# Altium PCB PCB1.PcbDoc
Units mil, origin at the board's own origin, x right, y up, seen from the top; angles counter-clockwise.
Board outline 3010.03 x 3160.03 mil, 2 copper layers (Top Layer, Bottom Layer); 6 components, 93 nets, 200 pads, 0 vias.
Unrouted connection lines stored in the file: 5.
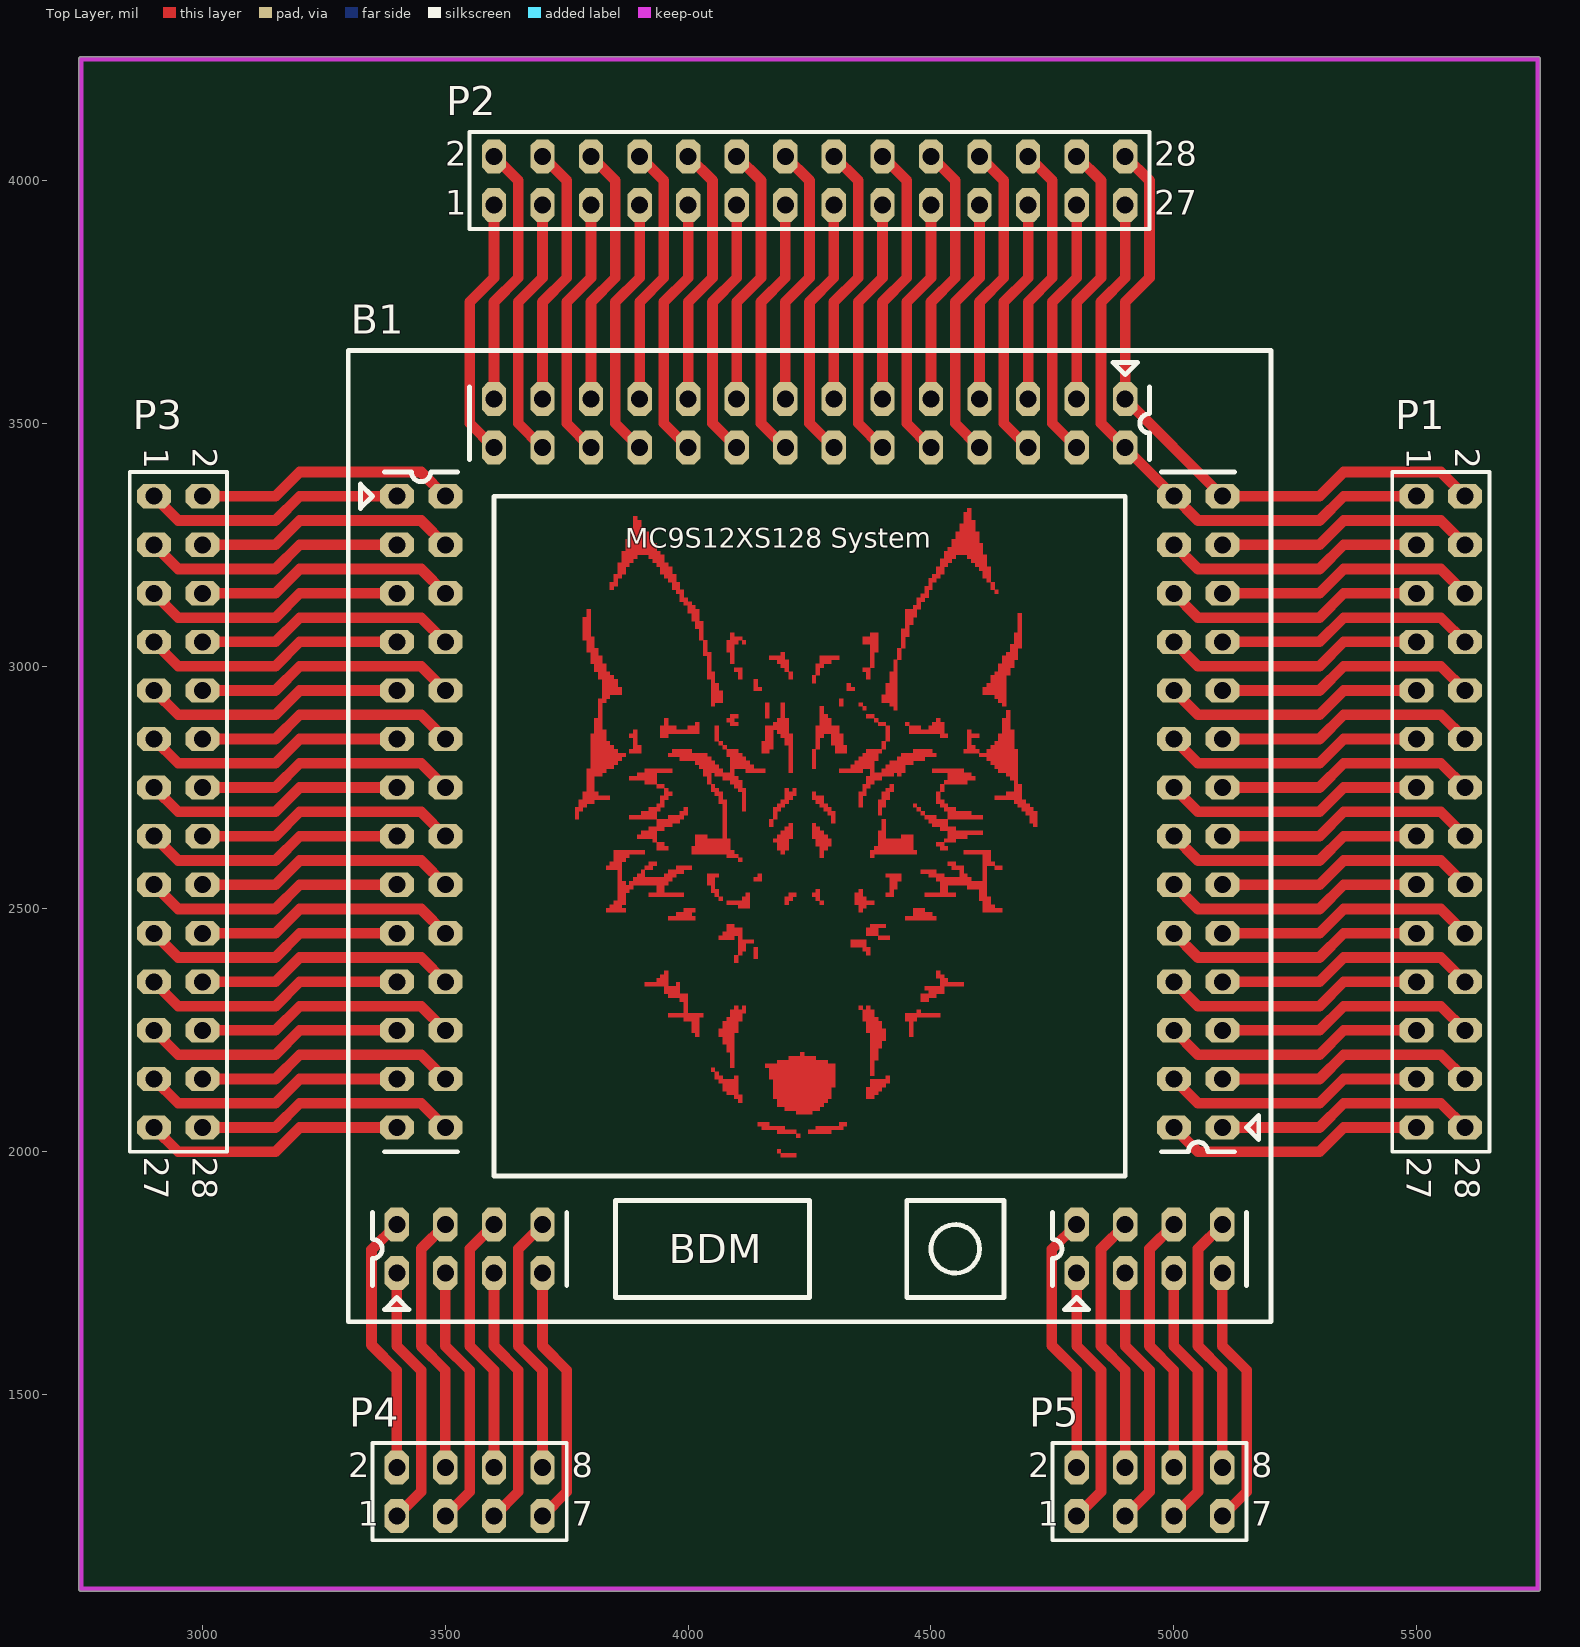
[diagram p0: Top Layer view]
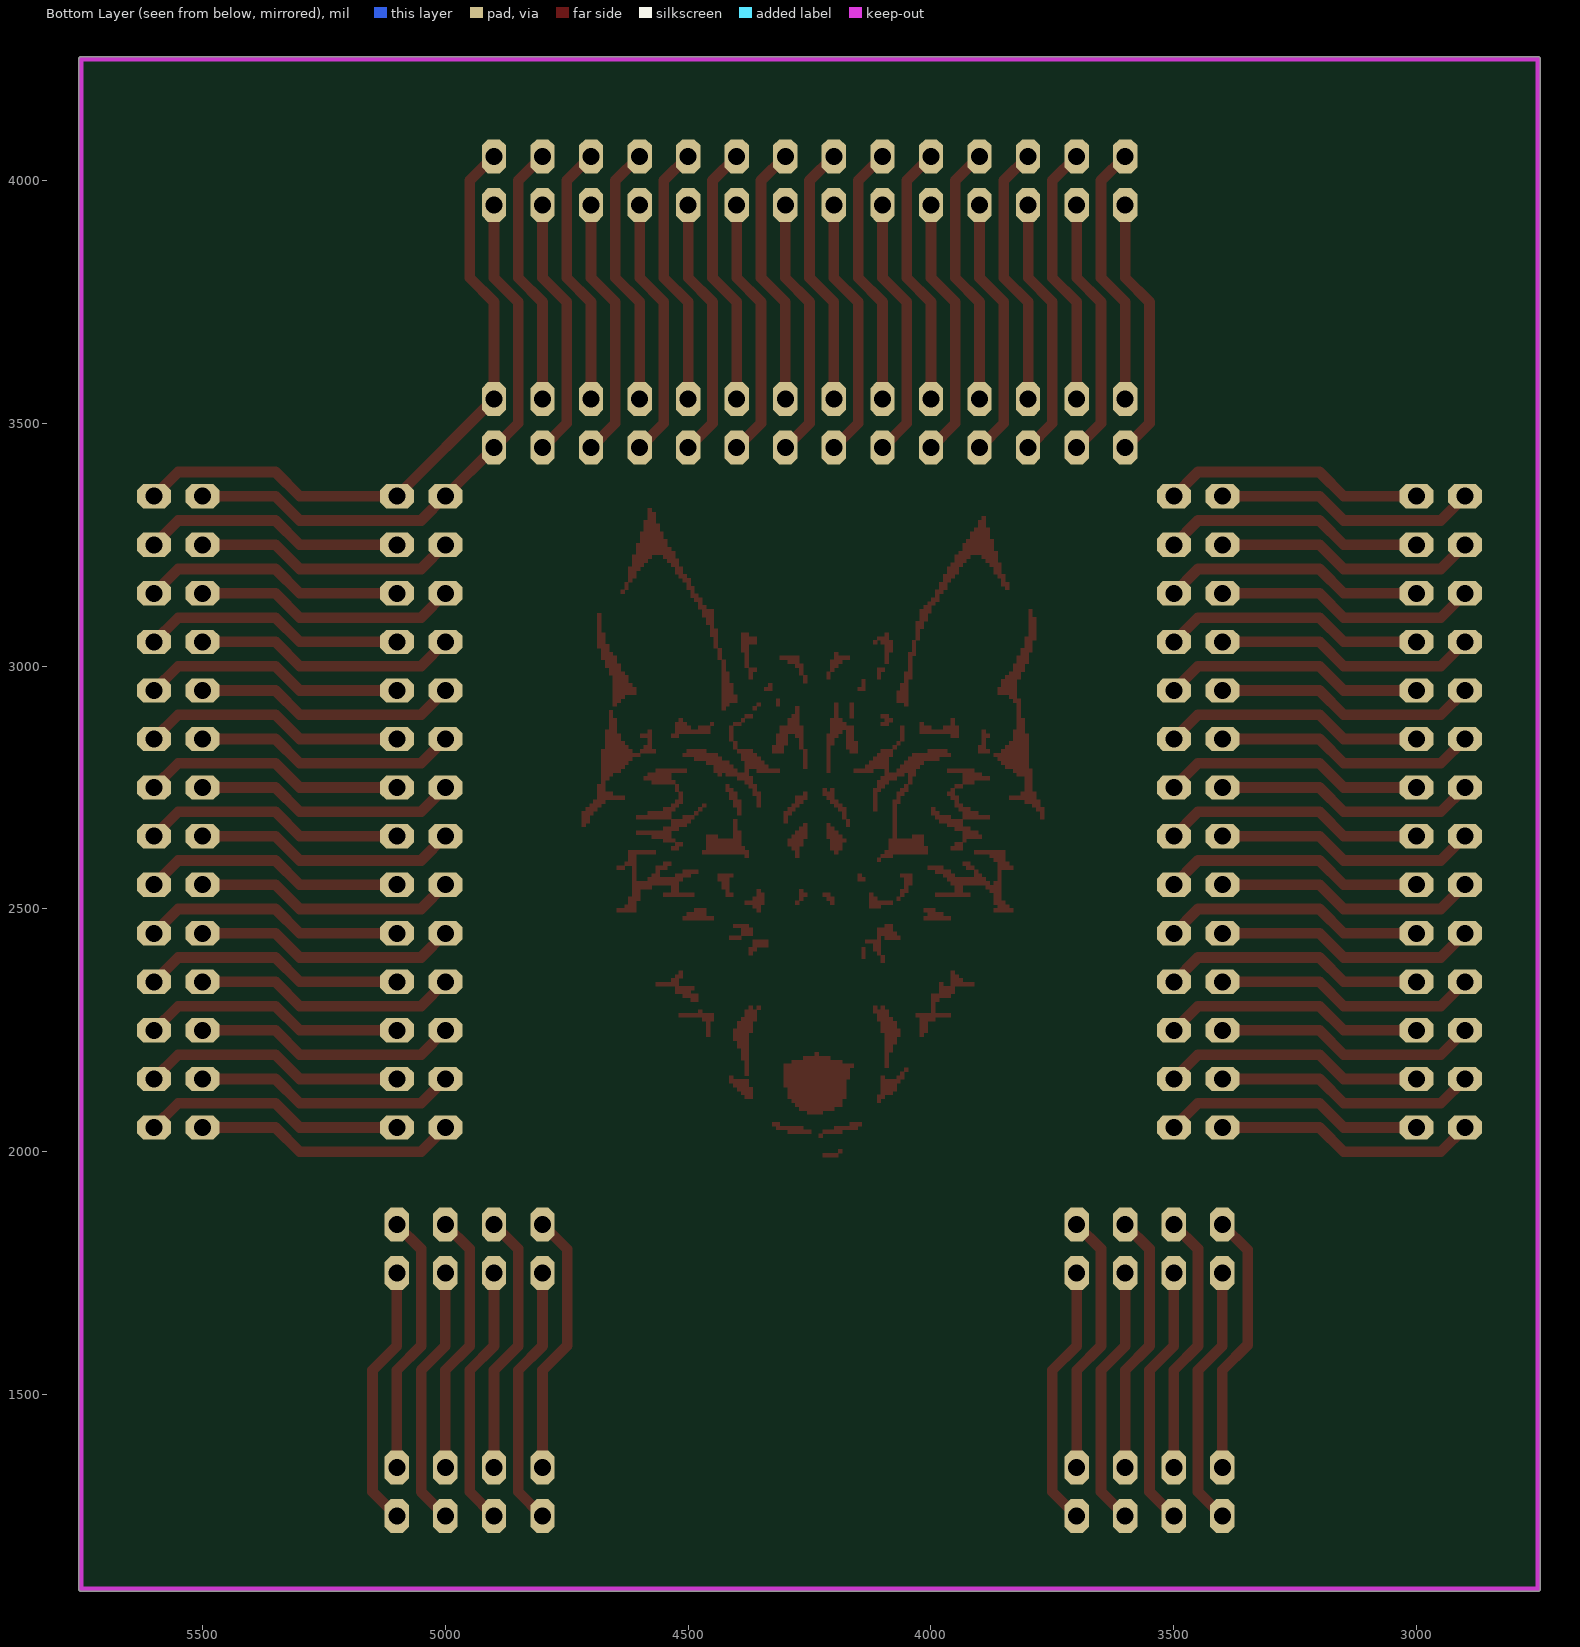
[diagram p1: Bottom Layer view, seen from below]

## Layer stack, top to bottom
Top Solder: solder mask 0.4, Solder Resist, Dk 3.5
Top Layer: signal copper 1.4
Dielectric 1: dielectric 12.6, FR-4, Dk 4.8
Bottom Layer: signal copper 1.4
Bottom Solder: solder mask 0.4, Solder Resist, Dk 3.5

## Board outline
2744.99,1100 ccw(c2750,1100) 2750,1094.98 5750,1094.98 ccw(c5750,1100) 5755.02,1100 5755.02,4250 ccw(c5750,4250) 5750,4255.02 2750,4255.02 ccw(c2750,4250) 2744.99,4250

## Design rules (kind name [scope] priority, off if disabled: settings)
Clearance [All] p1: gap=10
PolygonConnect [All] p1: connectstyle=Relief reliefconductorwidth=10 reliefentries=4 polygonreliefangle="90 Angle" airgapwidth=10
RoutingVias [All] p1: holewidth=28 width=50 viastyle="Through Hole" minholewidth=28 minwidth=50 maxholewidth=50 maxwidth=100
SolderMaskExpansion [All] p1: expansion=4
Width [All] p1: maxlimit=100 minlimit=10 preferedwidth=20
30 further rules are at their usual default settings.

## Components (designator, comment, footprint, x,y, rotation, side; value= is the part's Value field where it differs from the comment)
B1 "XS128P112_Board_2" XS128P112_BOARD 4250,2650 r0 top
P1 "Header 14X2" HDR2X14 5500,3350 r270 top
P2 "Header 14X2" HDR2X14 3600,3950 r0 top
P3 "Header 14X2" HDR2X14 2900,3350 r270 top
P4 "Header 4X2" HDR2X4 3400,1250 r0 top
P5 "Header 4X2" HDR2X4 4800,1250 r0 top

## Footprints (in the part's own frame and the unit in brackets; to place one, negate y for a bottom-side part, rotate by r counter-clockwise, add the part's x,y. Pads: shape width x height; smd on the part's side, far side on the other; paste and mask are expansions set on the pad)
HDR2X4 [mil] "Connector; Header; 4x2 Position"
  oct 50x70 hole 35: 1(0,0) 2(0,100) 3(100,0) 4(100,100) 5(200,0) 6(200,100) 7(300,0) 8(300,100)
  silkscreen extent -50,-50 350,150
HDR2X14 [mil] "Connector; Header; 14x2 Position"
  oct 50x70 hole 35: 1(0,0) 2(0,100) 3(100,0) 4(100,100) 5(200,0) 6(200,100) 7(300,0) 8(300,100) 9(400,0) 10(400,100) 11(500,0) 12(500,100) 13(600,0) 14(600,100) 15(700,0) 16(700,100) 17(800,0) 18(800,100) 19(900,0) 20(900,100) 21(1000,0) 22(1000,100) 23(1100,0) 24(1100,100) 25(1200,0) 26(1200,100) 27(1300,0) 28(1300,100)
  silkscreen extent -50,-50 1350,150
XS128P112_BOARD [mil]
  oct 70x50 hole 35: 101(-850,700) 102(-750,700) 103(-850,600) 104(-750,600) 105(-850,500) 106(-750,500) 107(-850,400) 108(-750,400) 109(-850,300) 110(-750,300) 111(-850,200) 112(-750,200) 113(-850,100) 114(-750,100) 115(-850,0) 116(-750,0) 117(-850,-100) 118(-750,-100) 119(-850,-200) 120(-750,-200) 121(-850,-300) 122(-750,-300) 123(-850,-400) 124(-750,-400) 125(-850,-500) 126(-750,-500) 127(-850,-600) 128(-750,-600) 301(850,-600) 302(750,-600) 303(850,-500) 304(750,-500) 305(850,-400) 306(750,-400) 307(850,-300) 308(750,-300) 309(850,-200) 310(750,-200) 311(850,-100) 312(750,-100) 313(850,0) 314(750,0) 315(850,100) 316(750,100) 317(850,200) 318(750,200) 319(850,300) 320(750,300) 321(850,400) 322(750,400) 323(850,500) 324(750,500) 325(850,600) 326(750,600) 327(850,700) 328(750,700)
  oct 50x70 hole 35: 201(650,900) 202(650,800) 203(550,900) 204(550,800) 205(450,900) 206(450,800) 207(350,900) 208(350,800) 209(250,900) 211(150,900) 212(150,800) 213(50,900) 214(50,800) 215(-50,900) 216(-50,800) 217(-150,900) 218(-150,800) 219(-250,900) 220(-250,800) 221(-350,900) 222(-350,800) 223(-450,900) 224(-450,800) 225(-550,900) 226(-550,800) 227(-650,900) 228(-650,800) 401(-850,-900) 402(-850,-800) 403(-750,-900) 404(-750,-800) 405(-650,-900) 406(-650,-800) 407(-550,-900) 408(-550,-800) 501(550,-900) 502(550,-800) 503(650,-900) 504(650,-800) 505(750,-900) 506(750,-800) 507(850,-900) 508(850,-800)
  oct 50x70 hole 35 paste+0: 210(250,800)
  silkscreen extent -950,-1000 950,1000

## Part data
P1 P2 P3: "Header, 14-Pin, Dual row"
P4 P5: "Header, 4-Pin, Dual row"

## Nets (pads, with @x,y where several pads share a name; then routed paths per layer and width w, separated by ;. In a path a pad name is that pad's centre, name@x,y a point inside that pad or via, vN(x,y) a via of type N, cw(c..) or ccw(c..) an arc to the next point about the centre after c; other vN are vias at no path point)
5V: B1.201 B1.203 B1.325 B1.327 P1.2 P1.4 P2.26 P2.28 | length 2448.5
  Top Layer w22: B1.203 4800,3750 4850,3800 4850,4000 P2.26 ; P2.28 4950,4000 4950,3800 4900,3750 B1.201 B1.327 5300,3350 5350,3400 5550,3400 P1.2 ; B1.325 5300,3250 5350,3300 5550,3300 P1.4
A0: B1.301 P1.28 | length 541.4
  Top Layer w22: B1.301 5300,2050 5350,2100 5550,2100 P1.28
A1: B1.302 P1.27 | length 541.4
  Top Layer w22: B1.302 5050,2000 5300,2000 5350,2050 P1.27
A2: B1.303 P1.26 | length 541.4
  Top Layer w22: B1.303 5300,2150 5350,2200 5550,2200 P1.26
A3: B1.304 P1.25 | length 541.4
  Top Layer w22: B1.304 5050,2100 5300,2100 5350,2150 P1.25
A4: B1.305 P1.24 | length 541.4
  Top Layer w22: B1.305 5300,2250 5350,2300 5550,2300 P1.24
A5: B1.306 P1.23 | length 541.4
  Top Layer w22: B1.306 5050,2200 5300,2200 5350,2250 P1.23
A6: B1.307 P1.22 | length 541.4
  Top Layer w22: B1.307 5300,2350 5350,2400 5550,2400 P1.22
A7: B1.308 P1.21 | length 541.4
  Top Layer w22: B1.308 5050,2300 5300,2300 5350,2350 P1.21
AD0: B1.309 P1.20 | length 541.4
  Top Layer w22: B1.309 5300,2450 5350,2500 5550,2500 P1.20
AD1: B1.311 P1.18 | length 541.4
  Top Layer w22: B1.311 5300,2550 5350,2600 5550,2600 P1.18
AD2: B1.313 P1.16 | length 541.4
  Top Layer w22: B1.313 5300,2650 5350,2700 5550,2700 P1.16
AD3: B1.315 P1.14 | length 541.4
  Top Layer w22: B1.315 5300,2750 5350,2800 5550,2800 P1.14
AD4: B1.317 P1.12 | length 541.4
  Top Layer w22: B1.317 5300,2850 5350,2900 5550,2900 P1.12
AD5: B1.319 P1.10 | length 541.4
  Top Layer w22: B1.319 5300,2950 5350,3000 5550,3000 P1.10
AD6: B1.321 P1.8 | length 541.4
  Top Layer w22: B1.321 5300,3050 5350,3100 5550,3100 P1.8
AD7: B1.323 P1.6 | length 541.4
  Top Layer w22: B1.323 5300,3150 5350,3200 5550,3200 P1.6
AD8: B1.310 P1.19 | length 541.4
  Top Layer w22: B1.310 5050,2400 5300,2400 5350,2450 P1.19
AD9: B1.312 P1.17 | length 541.4
  Top Layer w22: B1.312 5050,2500 5300,2500 5350,2550 P1.17
AD10: B1.314 P1.15 | length 541.4
  Top Layer w22: B1.314 5050,2600 5300,2600 5350,2650 P1.15
AD11: B1.316 P1.13 | length 541.4
  Top Layer w22: B1.316 5050,2700 5300,2700 5350,2750 P1.13
AD12: B1.318 P1.11 | length 541.4
  Top Layer w22: B1.318 5050,2800 5300,2800 5350,2850 P1.11
AD13: B1.320 P1.9 | length 541.4
  Top Layer w22: B1.320 5050,2900 5300,2900 5350,2950 P1.9
AD14: B1.322 P1.7 | length 541.4
  Top Layer w22: B1.322 5050,3000 5300,3000 5350,3050 P1.7
AD15: B1.324 P1.5 | length 541.4
  Top Layer w22: B1.324 5050,3100 5300,3100 5350,3150 P1.5
B0: B1.121 P3.21 | length 541.4
  Top Layer w22: P3.21 2950,2300 3150,2300 3200,2350 B1.121
B1: B1.122 P3.22 | length 541.4
  Top Layer w22: P3.22 3150,2350 3200,2400 3450,2400 B1.122
B2: B1.123 P3.23 | length 541.4
  Top Layer w22: P3.23 2950,2200 3150,2200 3200,2250 B1.123
B3: B1.124 P3.24 | length 541.4
  Top Layer w22: P3.24 3150,2250 3200,2300 3450,2300 B1.124
B4: B1.125 P3.25 | length 541.4
  Top Layer w22: P3.25 2950,2100 3150,2100 3200,2150 B1.125
B5: B1.126 P3.26 | length 541.4
  Top Layer w22: P3.26 3150,2150 3200,2200 3450,2200 B1.126
B6: B1.127 P3.27 | length 541.4
  Top Layer w22: P3.27 2950,2000 3150,2000 3200,2050 B1.127
B7: B1.128 P3.28 | length 541.4
  Top Layer w22: P3.28 3150,2050 3200,2100 3450,2100 B1.128
E0: B1.508 P5.8 | length 541.4
  Top Layer w22: P5.8 5100,1550 5050,1600 5050,1800 B1.508
E1: B1.507 P5.7 | length 541.4
  Top Layer w22: P5.7 5150,1300 5150,1550 5100,1600 B1.507
E2: B1.506 P5.6 | length 541.4
  Top Layer w22: P5.6 5000,1550 4950,1600 4950,1800 B1.506
E3: B1.505 P5.5 | length 541.4
  Top Layer w22: P5.5 5050,1300 5050,1550 5000,1600 B1.505
E4: B1.407 P4.7 | length 541.4
  Top Layer w22: P4.7 3750,1300 3750,1550 3700,1600 B1.407
E5: B1.405 P4.5 | length 541.4
  Top Layer w22: P4.5 3650,1300 3650,1550 3600,1600 B1.405
E6: B1.408 P4.8 | length 541.4
  Top Layer w22: P4.8 3700,1550 3650,1600 3650,1800 B1.408
E7: B1.406 P4.6 | length 541.4
  Top Layer w22: P4.6 3600,1550 3550,1600 3550,1800 B1.406
GND: B1.202 B1.204 B1.223 B1.326 B1.328 P1.1 P1.3 P2.6 P2.25 P2.27 | length 2848.5
  Top Layer w22: B1.223 3800,3750 3850,3800 3850,4000 P2.6 ; B1.204 4750,3500 4750,3750 4800,3800 P2.25 ; P2.27 4900,3800 4850,3750 4850,3500 B1.202 B1.328 5050,3300 5300,3300 5350,3350 P1.1 ; B1.326 5050,3200 5300,3200 5350,3250 P1.3
H0: B1.504 P5.4 | length 541.4
  Top Layer w22: P5.4 4900,1550 4850,1600 4850,1800 B1.504
H1: B1.503 P5.3 | length 541.4
  Top Layer w22: P5.3 4950,1300 4950,1550 4900,1600 B1.503
H2: B1.502 P5.2 | length 542.2
  Top Layer w22: P5.2 4800,1550 4749,1601 4749,1799 B1.502
H3: B1.501 P5.1 | length 541.4
  Top Layer w22: P5.1 4850,1300 4850,1550 4800,1600 B1.501
H4: B1.403 P4.3 | length 541.4
  Top Layer w22: P4.3 3550,1300 3550,1550 3500,1600 B1.403
H5: B1.404 P4.4 | length 541.4
  Top Layer w22: P4.4 3500,1550 3450,1600 3450,1800 B1.404
H6: B1.401 P4.1 | length 541.4
  Top Layer w22: P4.1 3450,1300 3450,1550 3400,1600 B1.401
H7: B1.402 P4.2 | length 543.1
  Top Layer w22: P4.2 3400,1550 3348,1602 3348,1798 B1.402
J0: B1.120 P3.20 | length 541.4
  Top Layer w22: P3.20 3150,2450 3200,2500 3450,2500 B1.120
J1: B1.119 P3.19 | length 541.4
  Top Layer w22: P3.19 2950,2400 3150,2400 3200,2450 B1.119
J6: B1.215 P2.14 | length 541.4
  Top Layer w22: B1.215 4200,3750 4250,3800 4250,4000 P2.14
J7: B1.216 P2.13 | length 541.4
  Top Layer w22: B1.216 4150,3500 4150,3750 4200,3800 P2.13
K0: B1.108 P3.8 | length 541.4
  Top Layer w22: P3.8 3150,3050 3200,3100 3450,3100 B1.108
K1: B1.107 P3.7 | length 541.4
  Top Layer w22: P3.7 2950,3000 3150,3000 3200,3050 B1.107
K2: B1.106 P3.6 | length 541.4
  Top Layer w22: P3.6 3150,3150 3200,3200 3450,3200 B1.106
K3: B1.105 P3.5 | length 541.4
  Top Layer w22: P3.5 2950,3100 3150,3100 3200,3150 B1.105
K4: B1.118 P3.18 | length 541.4
  Top Layer w22: P3.18 3150,2550 3200,2600 3450,2600 B1.118
K5: B1.117 P3.17 | length 541.4
  Top Layer w22: P3.17 2950,2500 3150,2500 3200,2550 B1.117
K7: B1.224 P2.5 | length 541.4
  Top Layer w22: B1.224 3750,3500 3750,3750 3800,3800 P2.5
M0: B1.221 P2.8 | length 541.4
  Top Layer w22: B1.221 3900,3750 3950,3800 3950,4000 P2.8
M1: B1.222 P2.7 | length 541.4
  Top Layer w22: B1.222 3850,3500 3850,3750 3900,3800 P2.7
M2: B1.219 P2.10 | length 541.4
  Top Layer w22: B1.219 4000,3750 4050,3800 4050,4000 P2.10
M3: B1.220 P2.9 | length 541.4
  Top Layer w22: B1.220 3950,3500 3950,3750 4000,3800 P2.9
M4: B1.217 P2.12 | length 541.4
  Top Layer w22: B1.217 4100,3750 4150,3800 4150,4000 P2.12
M5: B1.218 P2.11 | length 541.4
  Top Layer w22: B1.218 4050,3500 4050,3750 4100,3800 P2.11
M6: B1.205 P2.24 | length 541.4
  Top Layer w22: B1.205 4700,3750 4750,3800 4750,4000 P2.24
M7: B1.206 P2.23 | length 541.4
  Top Layer w22: B1.206 4650,3500 4650,3750 4700,3800 P2.23
P0: B1.104 P3.4 | length 541.4
  Top Layer w22: P3.4 3150,3250 3200,3300 3450,3300 B1.104
P1: B1.103 P3.3 | length 541.4
  Top Layer w22: P3.3 2950,3200 3150,3200 3200,3250 B1.103
P2: B1.102 P3.2 | length 541.4
  Top Layer w22: P3.2 3150,3350 3200,3400 3450,3400 B1.102
P3: B1.101 P3.1 | length 541.4
  Top Layer w22: P3.1 2950,3300 3150,3300 3200,3350 B1.101
P4: B1.228 P2.1 | length 541.4
  Top Layer w22: B1.228 3550,3500 3550,3750 3600,3800 P2.1
P5: B1.227 P2.2 | length 541.4
  Top Layer w22: B1.227 3600,3750 3650,3800 3650,4000 P2.2
P6: B1.226 P2.3 | length 541.4
  Top Layer w22: B1.226 3650,3500 3650,3750 3700,3800 P2.3
P7: B1.225 P2.4 | length 541.4
  Top Layer w22: B1.225 3700,3750 3750,3800 3750,4000 P2.4
S0: B1.208 P2.21 | length 541.4
  Top Layer w22: B1.208 4550,3500 4550,3750 4600,3800 P2.21
S1: B1.207 P2.22 | length 541.4
  Top Layer w22: B1.207 4600,3750 4650,3800 4650,4000 P2.22
S2: B1.210 P2.19 | length 541.4
  Top Layer w22: B1.210 4450,3500 4450,3750 4500,3800 P2.19
S3: B1.209 P2.20 | length 541.4
  Top Layer w22: B1.209 4500,3750 4550,3800 4550,4000 P2.20
S4: B1.212 P2.17 | length 541.4
  Top Layer w22: B1.212 4350,3500 4350,3750 4400,3800 P2.17
S5: B1.211 P2.18 | length 541.4
  Top Layer w22: B1.211 4400,3750 4450,3800 4450,4000 P2.18
S6: B1.214 P2.15 | length 541.4
  Top Layer w22: B1.214 4250,3500 4250,3750 4300,3800 P2.15
S7: B1.213 P2.16 | length 541.4
  Top Layer w22: B1.213 4300,3750 4350,3800 4350,4000 P2.16
T0: B1.109 P3.9 | length 541.4
  Top Layer w22: P3.9 2950,2900 3150,2900 3200,2950 B1.109
T1: B1.110 P3.10 | length 541.4
  Top Layer w22: P3.10 3150,2950 3200,3000 3450,3000 B1.110
T2: B1.111 P3.11 | length 541.4
  Top Layer w22: P3.11 2950,2800 3150,2800 3200,2850 B1.111
T3: B1.112 P3.12 | length 541.4
  Top Layer w22: P3.12 3150,2850 3200,2900 3450,2900 B1.112
T4: B1.113 P3.13 | length 541.4
  Top Layer w22: P3.13 2950,2700 3150,2700 3200,2750 B1.113
T5: B1.114 P3.14 | length 541.4
  Top Layer w22: P3.14 3150,2750 3200,2800 3450,2800 B1.114
T6: B1.115 P3.15 | length 541.4
  Top Layer w22: P3.15 2950,2600 3150,2600 3200,2650 B1.115
T7: B1.116 P3.16 | length 541.4
  Top Layer w22: P3.16 3150,2650 3200,2700 3450,2700 B1.116

## Keep-outs
Keep-Out Layer:
  lines w10: 2750,1150 2750,1100 ; 2750,1100 2750,4250 5750,4250 5750,1100 2750,1100

## Other copper
Top Layer:
  drawing of 71 lines, arcs and shapes, not listed

## Text inside footprints (layer, text, board x,y; h text height)
B1: Top Overlay "MC9S12XS128 System" at 3870,3230 h70; Top Overlay "BDM" at 3960,1770 h60
P1: Top Overlay "28" at 5580,1990 h50 r270; Top Overlay "27" at 5480,1990 h50 r270; Top Overlay "1" at 5480,3450 h50 r270; Top Overlay "2" at 5580,3450 h50 r270
P2: Top Overlay "28" at 4960,4030 h50; Top Overlay "27" at 4960,3930 h50; Top Overlay "1" at 3500,3930 h50; Top Overlay "2" at 3500,4030 h50
P3: Top Overlay "28" at 2980,1990 h50 r270; Top Overlay "27" at 2880,1990 h50 r270; Top Overlay "1" at 2880,3450 h50 r270; Top Overlay "2" at 2980,3450 h50 r270
P4: Top Overlay "8" at 3760,1330 h50; Top Overlay "7" at 3760,1230 h50; Top Overlay "1" at 3320,1230 h50; Top Overlay "2" at 3300,1330 h50
P5: Top Overlay "8" at 5160,1330 h50; Top Overlay "7" at 5160,1230 h50; Top Overlay "1" at 4720,1230 h50; Top Overlay "2" at 4700,1330 h50